# EAGLE board BlinkyTile_panel (EAGLE 7.1.0), part 1 of 2
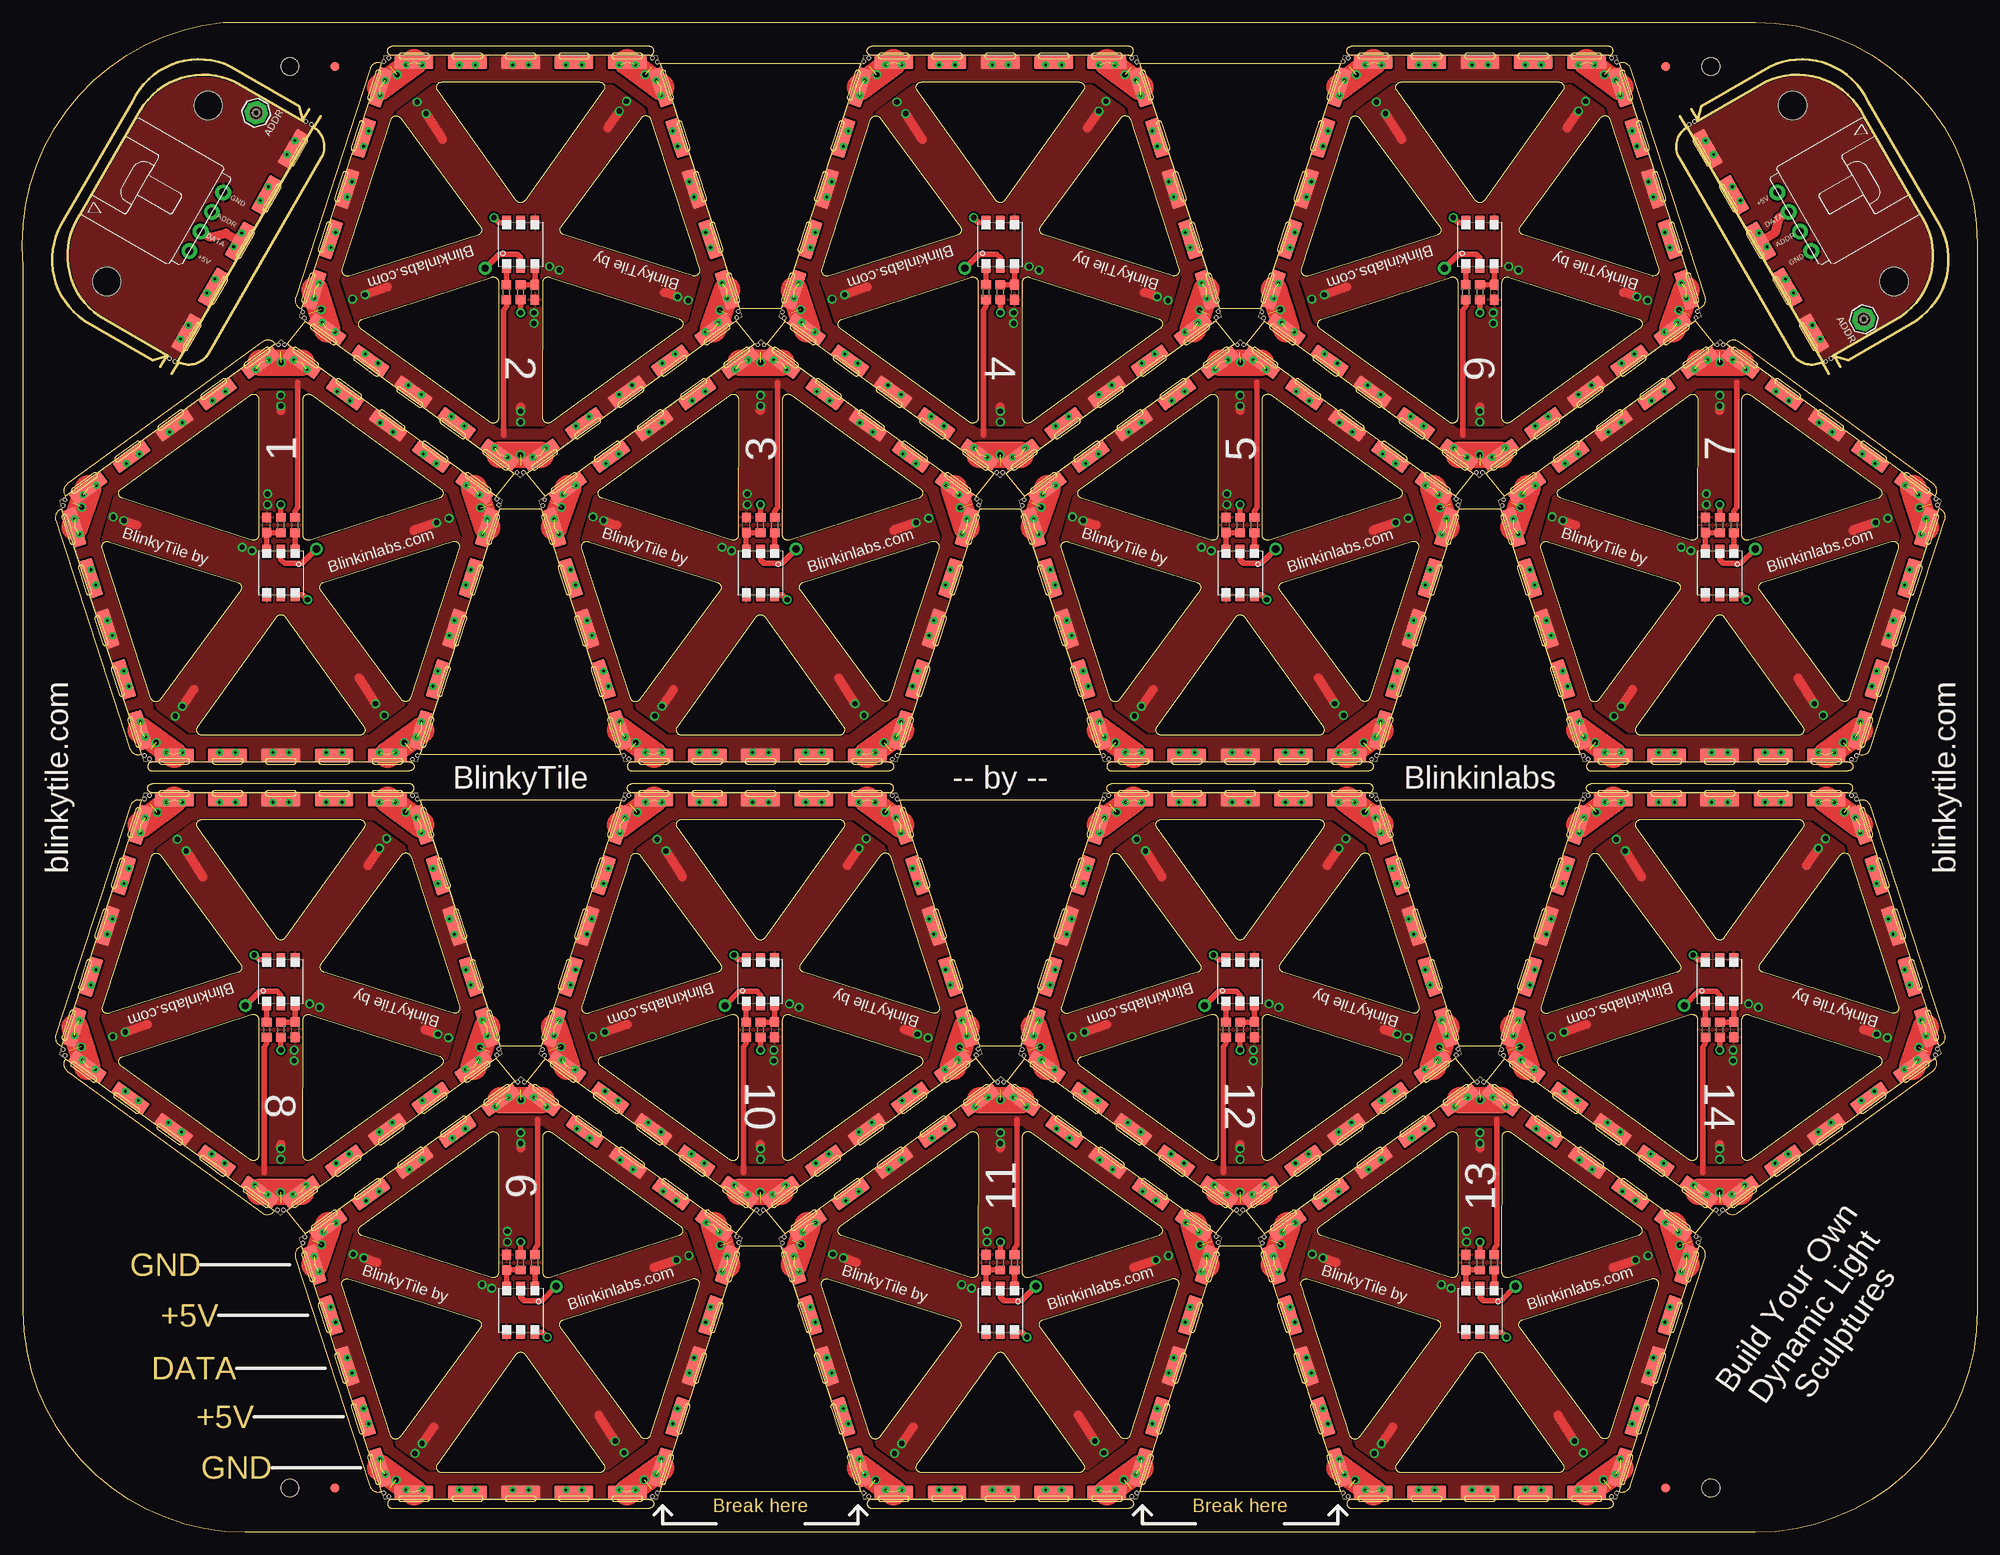
[diagram p0: board, top side]
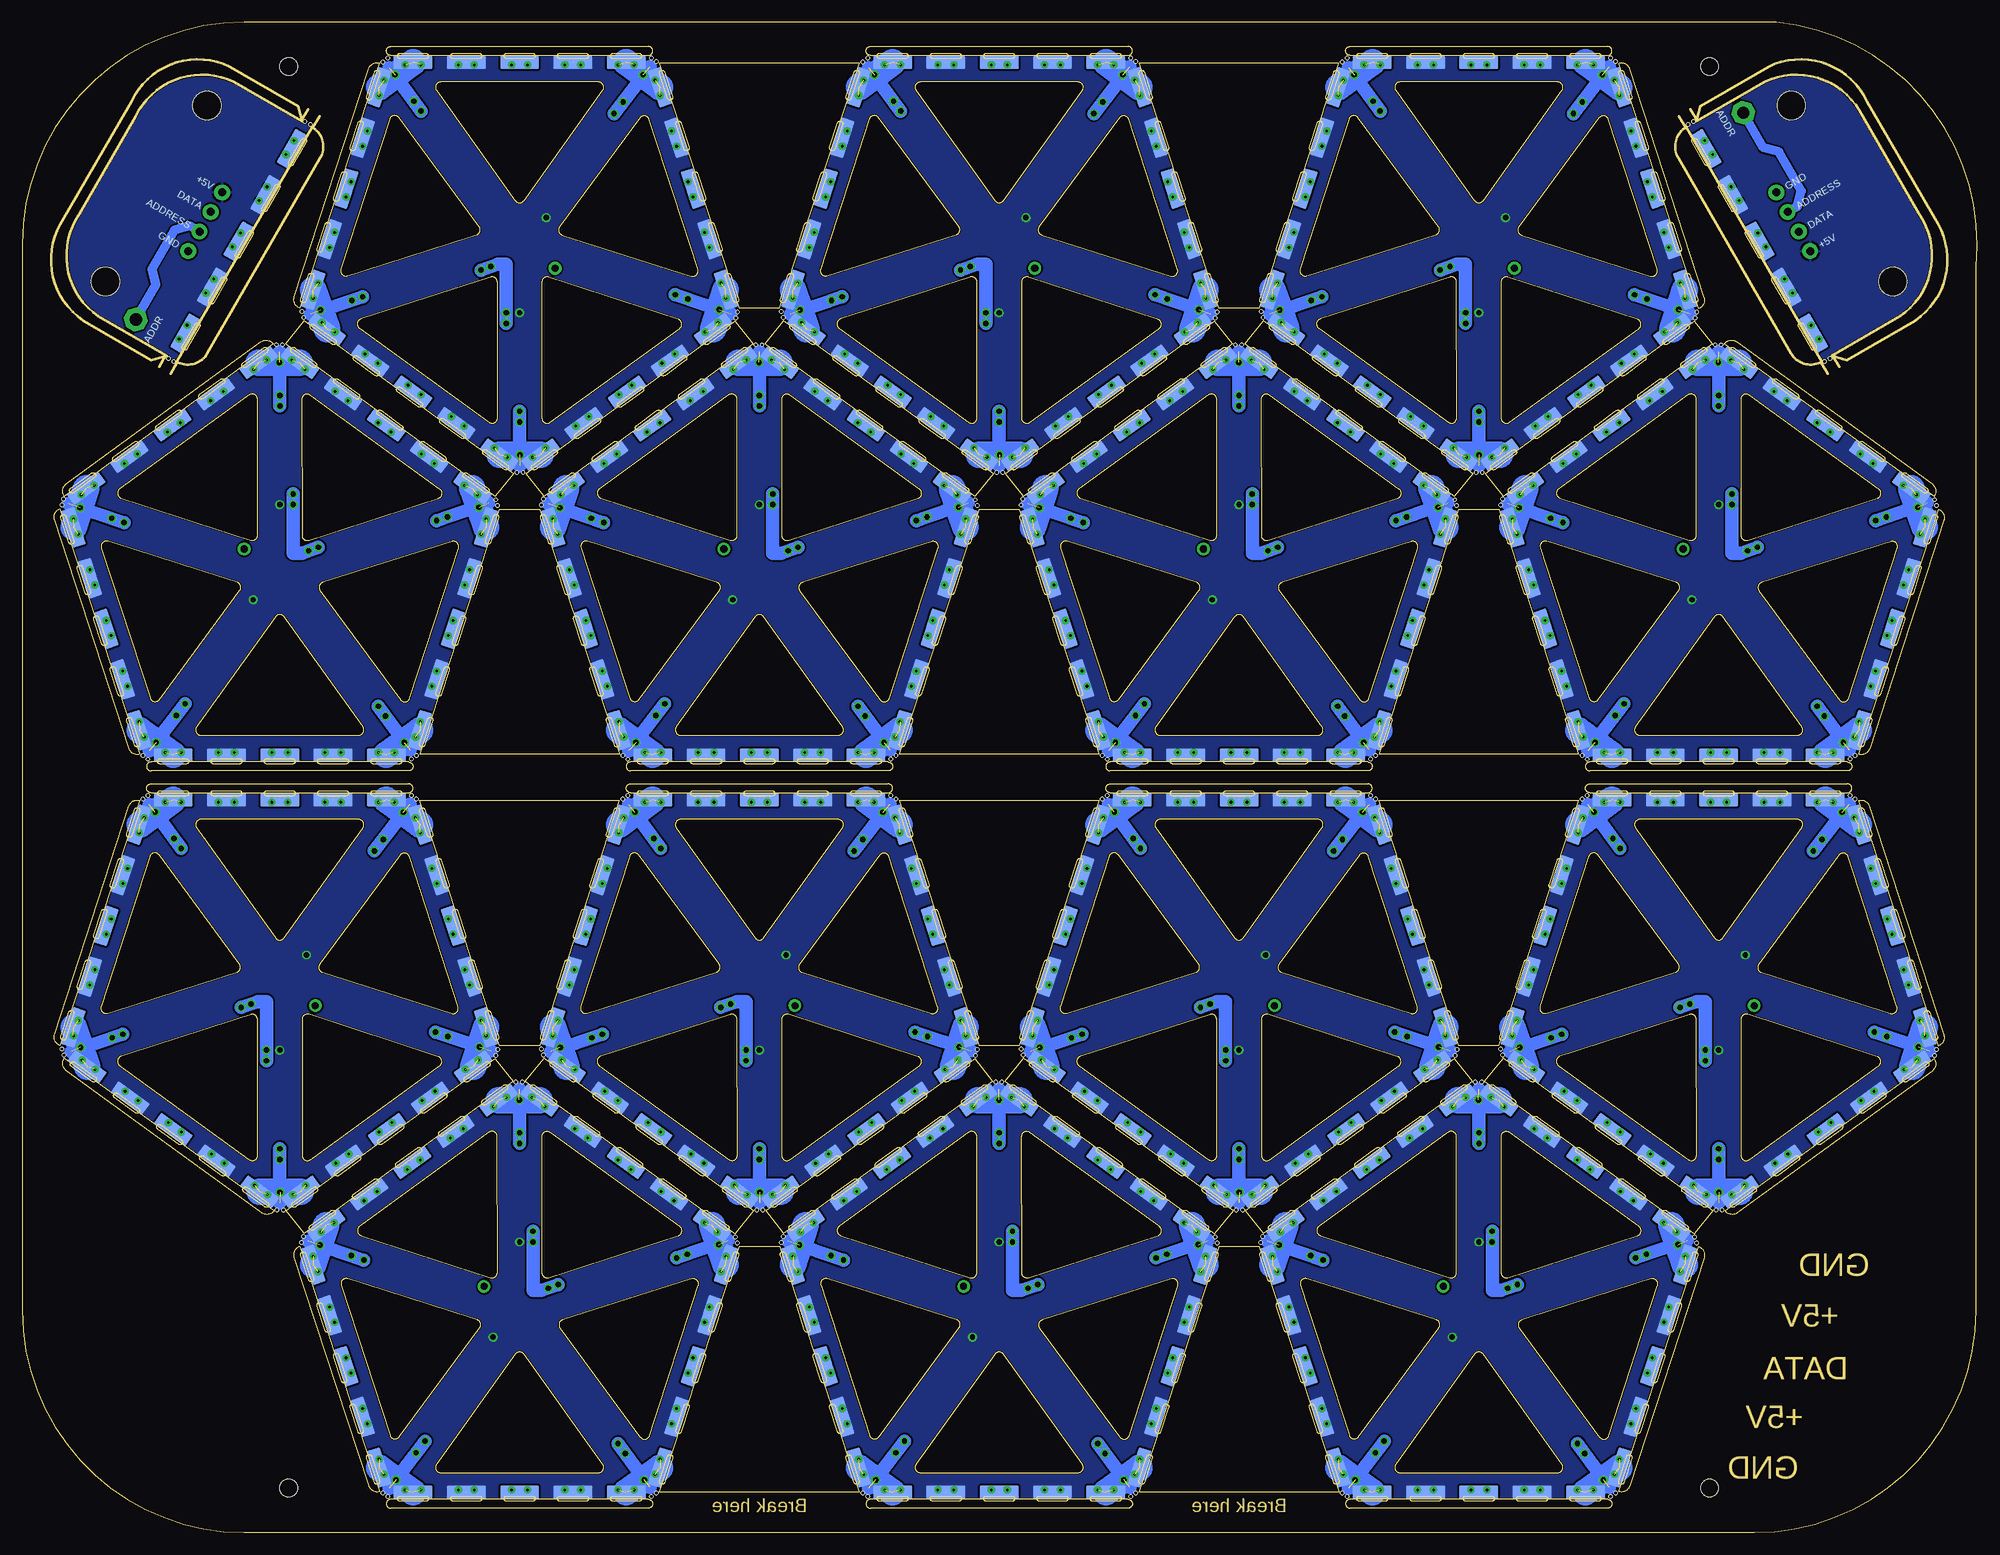
[diagram p1: board, bottom side, seen from below]

Size 220.12 x 170 mm. Coordinates in mm from the lower left corner, seen from the top.
Outline: 666 segments
Copper layers (1*16): Top 0.035mm / dielectric 1.5mm / Bottom 0.035mm
Design rules "default *": minimum track width 10mil, minimum drill 0.6mm, track to track 8mil, track to pad 8mil, pad to pad 8mil, via to via 8mil, smd to smd 8mil, copper to edge 0.1mm, drill to drill 8mil, minimum pad ring 10mil, minimum via ring 8mil, stop-mask expansion 4mil, vias tented up to drill 0.6mm, thermal gap 10mil
Holes 3.2 mm at 9.51,140.82 20.94,160.61 199.31,160.61 210.74,140.82
Holes 2 mm at 30.12,5 30.12,165 190.12,165 190.12,5

## Footprints (pad centres in the part's own frame; a part is rotated, then mirrored left to right if it is on the bottom)
C0603 = smd 1.1 x 1: 1 -0.85,0; 2 0.85,0
MOUSE_BITE_1 = hole 0.4: -0.35,0; 0.35,0
MOUSE_BITE = hole 0.4: -0.35,0.15; 0.35,0.15
DUPONT-4P = drill 0.9 pad 1.778: P$1 -3.81,0; P$2 -1.27,0; P$3 1.27,0; P$4 3.81,0
FIDUCIAL-1X2 = smd 1 x 1: 1 0,0
SE14 = drill 1.397 pad 2.54 octagon: MP 0,0
R0603 = smd 1 x 1.1: 1 -0.85,0; 2 0.85,0
D_EDGE_SLOT_MOD = drill 0.3: GNDVIA1 -12.9,1; GNDVIA3 -11.1,1; GNDVIA4 11.1,1; GNDVIA6 12.9,1; PWRVIA1 -6.9,1; PWRVIA3 -5.1,1; PWRVIA4 5.1,1; PWRVIA6 6.9,1; SIGVIA1 -0.9,1; SIGVIA3 0.9,1 | smd 4.4 x 1.5: P$1 -12,0.73; P$2 -6,0.73; P$3 0,0.73; P$4 6,0.73; P$5 12,0.73 | smd 4.4 x 1.5 bottom: P$6 -12,0.73; P$7 -6,0.73; P$8 0,0.73; P$9 6,0.73; P$10 12,0.73
WS2822S_LED = smd 1.5 x 1: 1 -2.45,1.6; 2 -2.45,0; 3 -2.45,-1.6; 4 2.45,-1.6; 5 2.45,0; 6 2.45,1.6

## Placement (x,y rotation side)
C1  .1uF  [C0603]  27.52,113.4 90 top
C2  .1uF  [C0603]  81.52,113.4 90 top
C3  .1uF  [C0603]  57.72,139.6 270 top
C5  .1uF  [C0603]  111.72,139.6 270 top
C6  .1uF  [C0603]  135.52,113.4 90 top
C7  .1uF  [C0603]  165.72,139.6 270 top
C8  .1uF  [C0603]  189.52,113.4 90 top
C9  .1uF  [C0603]  192.72,56.6 270 top
C10  .1uF  [C0603]  138.72,56.6 270 top
C11  .1uF  [C0603]  162.52,30.4 90 top
C12  .1uF  [C0603]  108.52,30.4 90 top
C13  .1uF  [C0603]  84.72,56.6 270 top
C14  .1uF  [C0603]  54.52,30.4 90 top
C15  .1uF  [C0603]  30.72,56.6 270 top
E$1  [MOUSE_BITE_1]  29.17,133.69 0 top
E$2  [MOUSE_BITE_1]  14.02,87.25 144 top
E$3  [MOUSE_BITE_1]  44.22,87.24 216 top
E$4  [MOUSE_BITE_1]  53.56,115.97 288 top
E$5  [MOUSE_BITE_1]  4.71,115.92 72 top
E$6  [MOUSE_BITE_1]  83.17,133.69 0 top
E$7  [MOUSE_BITE_1]  68.02,87.25 144 top
E$8  [MOUSE_BITE_1]  98.22,87.24 216 top
E$9  [MOUSE_BITE_1]  107.56,115.97 288 top
E$10  [MOUSE_BITE_1]  58.71,115.92 72 top
E$11  [MOUSE_BITE_1]  56.07,119.31 180 top
E$12  [MOUSE_BITE_1]  71.22,165.75 324 top
E$13  [MOUSE_BITE_1]  41.02,165.76 36 top
E$14  [MOUSE_BITE_1]  31.69,137.03 108 top
E$15  [MOUSE_BITE_1]  80.54,137.08 252 top
E$16  [MOUSE_BITE]  16.95,132.12 150 top
E$17  [MOUSE_BITE]  32.19,158.52 330 top
E$18  [DUPONT-4P]  20.72,147.54 60 top
E$19  [MOUSE_BITE]  188.05,158.52 30 top
E$20  [MOUSE_BITE]  203.29,132.12 210 top
E$21  [MOUSE_BITE_1]  110.07,119.31 180 top
E$22  [MOUSE_BITE_1]  125.22,165.75 324 top
E$23  [MOUSE_BITE_1]  95.02,165.76 36 top
E$24  [MOUSE_BITE_1]  85.69,137.03 108 top
E$25  [MOUSE_BITE_1]  134.54,137.08 252 top
E$26  [MOUSE_BITE_1]  137.17,133.69 0 top
E$27  [MOUSE_BITE_1]  122.02,87.25 144 top
E$28  [MOUSE_BITE_1]  152.22,87.24 216 top
E$29  [MOUSE_BITE_1]  161.56,115.97 288 top
E$30  [MOUSE_BITE_1]  112.71,115.92 72 top
E$31  [MOUSE_BITE_1]  164.07,119.31 180 top
E$32  [MOUSE_BITE_1]  179.22,165.75 324 top
E$33  [MOUSE_BITE_1]  149.02,165.76 36 top
E$34  [MOUSE_BITE_1]  139.69,137.03 108 top
E$35  [MOUSE_BITE_1]  188.54,137.08 252 top
E$36  [MOUSE_BITE_1]  191.17,133.69 0 top
E$37  [MOUSE_BITE_1]  176.02,87.25 144 top
E$38  [MOUSE_BITE_1]  206.22,87.24 216 top
E$39  [MOUSE_BITE_1]  215.56,115.97 288 top
E$40  [MOUSE_BITE_1]  166.71,115.92 72 top
E$41  [MOUSE_BITE_1]  191.07,36.31 180 top
E$42  [MOUSE_BITE_1]  206.22,82.75 324 top
E$43  [MOUSE_BITE_1]  176.02,82.76 36 top
E$44  [MOUSE_BITE_1]  166.69,54.03 108 top
E$45  [MOUSE_BITE_1]  215.54,54.08 252 top
E$46  [MOUSE_BITE_1]  137.07,36.31 180 top
E$47  [MOUSE_BITE_1]  152.22,82.75 324 top
E$48  [MOUSE_BITE_1]  122.02,82.76 36 top
E$49  [MOUSE_BITE_1]  112.69,54.03 108 top
E$50  [MOUSE_BITE_1]  161.54,54.08 252 top
E$51  [MOUSE_BITE_1]  164.17,50.69 0 top
E$52  [MOUSE_BITE_1]  149.02,4.25 144 top
E$53  [MOUSE_BITE_1]  179.22,4.24 216 top
E$54  [MOUSE_BITE_1]  188.56,32.97 288 top
E$55  [MOUSE_BITE_1]  139.71,32.92 72 top
E$56  [MOUSE_BITE_1]  110.17,50.69 0 top
E$57  [MOUSE_BITE_1]  95.02,4.25 144 top
E$58  [MOUSE_BITE_1]  125.22,4.24 216 top
E$59  [MOUSE_BITE_1]  134.56,32.97 288 top
E$60  [MOUSE_BITE_1]  85.71,32.92 72 top
E$61  [MOUSE_BITE_1]  83.07,36.31 180 top
E$62  [MOUSE_BITE_1]  98.22,82.75 324 top
E$63  [MOUSE_BITE_1]  68.02,82.76 36 top
E$64  [MOUSE_BITE_1]  58.69,54.03 108 top
E$65  [MOUSE_BITE_1]  107.54,54.08 252 top
E$66  [MOUSE_BITE_1]  56.17,50.69 0 top
E$67  [MOUSE_BITE_1]  41.02,4.25 144 top
E$68  [MOUSE_BITE_1]  71.22,4.24 216 top
E$69  [MOUSE_BITE_1]  80.56,32.97 288 top
E$70  [MOUSE_BITE_1]  31.71,32.92 72 top
E$71  [MOUSE_BITE_1]  29.07,36.31 180 top
E$72  [MOUSE_BITE_1]  44.22,82.75 324 top
E$73  [MOUSE_BITE_1]  14.02,82.76 36 top
E$74  [MOUSE_BITE_1]  4.69,54.03 108 top
E$75  [MOUSE_BITE_1]  53.54,54.08 252 top
E$76  [DUPONT-4P]  199.52,147.54 300 top
E$77  [FIDUCIAL-1X2]  35.2,165 0 top
E$78  [FIDUCIAL-1X2]  185.04,5 0 top
E$79  [FIDUCIAL-1X2]  185.04,165 0 top
E$80  [FIDUCIAL-1X2]  35.2,5 0 top
PROG  [SE14]  26.34,159.81 60 top
PROG1  [SE14]  207.34,136.54 300 top
R1  75  [R0603]  29.12,113.4 270 top
R2  10k  [R0603]  30.72,113.4 90 top
R3  75  [R0603]  83.12,113.4 270 top
R4  10k  [R0603]  84.72,113.4 90 top
R5  75  [R0603]  56.12,139.6 90 top
R6  10k  [R0603]  54.52,139.6 270 top
R9  75  [R0603]  110.12,139.6 90 top
R10  10k  [R0603]  108.52,139.6 270 top
R11  75  [R0603]  137.12,113.4 270 top
R12  10k  [R0603]  138.72,113.4 90 top
R13  75  [R0603]  164.12,139.6 90 top
R14  10k  [R0603]  162.52,139.6 270 top
R15  75  [R0603]  191.12,113.4 270 top
R16  10k  [R0603]  192.72,113.4 90 top
R17  75  [R0603]  191.12,56.6 90 top
R18  10k  [R0603]  189.52,56.6 270 top
R19  75  [R0603]  137.12,56.6 90 top
R20  10k  [R0603]  135.52,56.6 270 top
R21  75  [R0603]  164.12,30.4 270 top
R22  10k  [R0603]  165.72,30.4 90 top
R23  75  [R0603]  110.12,30.4 270 top
R24  10k  [R0603]  111.72,30.4 90 top
R25  75  [R0603]  83.12,56.6 90 top
R26  10k  [R0603]  81.52,56.6 270 top
R27  75  [R0603]  56.12,30.4 270 top
R28  10k  [R0603]  57.72,30.4 90 top
R29  75  [R0603]  29.12,56.6 90 top
R30  10k  [R0603]  27.52,56.6 270 top
U$1  D_EDGEMOD  [D_EDGE_SLOT_MOD]  83.12,86.8 0 top
U$2  D_EDGEMOD  [D_EDGE_SLOT_MOD]  29.12,86.8 0 top
U$3  D_EDGEMOD  [D_EDGE_SLOT_MOD]  49.32,101.5 72 top
U$4  D_EDGEMOD  [D_EDGE_SLOT_MOD]  8.92,101.5 288 top
U$5  D_EDGEMOD  [D_EDGE_SLOT_MOD]  41.62,125.2 144 top
U$6  D_EDGEMOD  [D_EDGE_SLOT_MOD]  16.72,125.2 216 top
U$7  WS2822S_LED  [WS2822S_LED]  29.12,108 270 top
U$8  D_EDGEMOD  [D_EDGE_SLOT_MOD]  103.32,101.5 72 top
U$9  D_EDGEMOD  [D_EDGE_SLOT_MOD]  62.92,101.5 288 top
U$10  D_EDGEMOD  [D_EDGE_SLOT_MOD]  95.62,125.2 144 top
U$11  D_EDGEMOD  [D_EDGE_SLOT_MOD]  70.72,125.2 216 top
U$12  WS2822S_LED  [WS2822S_LED]  83.12,108 270 top
U$13  D_EDGEMOD  [D_EDGE_SLOT_MOD]  56.12,166.2 180 top
U$14  D_EDGEMOD  [D_EDGE_SLOT_MOD]  35.92,151.5 252 top
U$15  D_EDGEMOD  [D_EDGE_SLOT_MOD]  76.32,151.5 108 top
U$16  D_EDGEMOD  [D_EDGE_SLOT_MOD]  43.62,127.8 324 top
U$17  D_EDGEMOD  [D_EDGE_SLOT_MOD]  68.52,127.8 36 top
U$18  WS2822S_LED  [WS2822S_LED]  56.12,145 90 top
U$19  D_EDGEMOD  [D_EDGE_SLOT_MOD]  195.12,145 300 top
U$25  D_EDGEMOD  [D_EDGE_SLOT_MOD]  110.12,166.2 180 top
U$26  D_EDGEMOD  [D_EDGE_SLOT_MOD]  89.92,151.5 252 top
U$27  D_EDGEMOD  [D_EDGE_SLOT_MOD]  130.32,151.5 108 top
U$28  D_EDGEMOD  [D_EDGE_SLOT_MOD]  97.62,127.8 324 top
U$29  D_EDGEMOD  [D_EDGE_SLOT_MOD]  122.52,127.8 36 top
U$30  WS2822S_LED  [WS2822S_LED]  110.12,145 90 top
U$31  D_EDGEMOD  [D_EDGE_SLOT_MOD]  137.12,86.8 0 top
U$32  D_EDGEMOD  [D_EDGE_SLOT_MOD]  157.32,101.5 72 top
U$33  D_EDGEMOD  [D_EDGE_SLOT_MOD]  116.92,101.5 288 top
U$34  D_EDGEMOD  [D_EDGE_SLOT_MOD]  149.62,125.2 144 top
U$35  D_EDGEMOD  [D_EDGE_SLOT_MOD]  124.72,125.2 216 top
U$36  WS2822S_LED  [WS2822S_LED]  137.12,108 270 top
U$37  D_EDGEMOD  [D_EDGE_SLOT_MOD]  164.12,166.2 180 top
U$38  D_EDGEMOD  [D_EDGE_SLOT_MOD]  143.92,151.5 252 top
U$39  D_EDGEMOD  [D_EDGE_SLOT_MOD]  184.32,151.5 108 top
U$40  D_EDGEMOD  [D_EDGE_SLOT_MOD]  151.62,127.8 324 top
U$41  D_EDGEMOD  [D_EDGE_SLOT_MOD]  176.52,127.8 36 top
U$42  WS2822S_LED  [WS2822S_LED]  164.12,145 90 top
U$43  D_EDGEMOD  [D_EDGE_SLOT_MOD]  191.12,86.8 0 top
U$44  D_EDGEMOD  [D_EDGE_SLOT_MOD]  211.32,101.5 72 top
U$45  D_EDGEMOD  [D_EDGE_SLOT_MOD]  170.92,101.5 288 top
U$46  D_EDGEMOD  [D_EDGE_SLOT_MOD]  203.62,125.2 144 top
U$47  D_EDGEMOD  [D_EDGE_SLOT_MOD]  178.72,125.2 216 top
U$48  WS2822S_LED  [WS2822S_LED]  191.12,108 270 top
U$49  D_EDGEMOD  [D_EDGE_SLOT_MOD]  191.12,83.2 180 top
U$50  D_EDGEMOD  [D_EDGE_SLOT_MOD]  170.92,68.5 252 top
U$51  D_EDGEMOD  [D_EDGE_SLOT_MOD]  211.32,68.5 108 top
U$52  D_EDGEMOD  [D_EDGE_SLOT_MOD]  178.62,44.8 324 top
U$53  D_EDGEMOD  [D_EDGE_SLOT_MOD]  203.52,44.8 36 top
U$54  WS2822S_LED  [WS2822S_LED]  191.12,62 90 top
U$55  D_EDGEMOD  [D_EDGE_SLOT_MOD]  137.12,83.2 180 top
U$56  D_EDGEMOD  [D_EDGE_SLOT_MOD]  116.92,68.5 252 top
U$57  D_EDGEMOD  [D_EDGE_SLOT_MOD]  157.32,68.5 108 top
U$58  D_EDGEMOD  [D_EDGE_SLOT_MOD]  124.62,44.8 324 top
U$59  D_EDGEMOD  [D_EDGE_SLOT_MOD]  149.52,44.8 36 top
U$60  WS2822S_LED  [WS2822S_LED]  137.12,62 90 top
U$61  D_EDGEMOD  [D_EDGE_SLOT_MOD]  164.12,3.8 0 top
U$62  D_EDGEMOD  [D_EDGE_SLOT_MOD]  184.32,18.5 72 top
U$63  D_EDGEMOD  [D_EDGE_SLOT_MOD]  143.92,18.5 288 top
U$64  D_EDGEMOD  [D_EDGE_SLOT_MOD]  176.62,42.2 144 top
U$65  D_EDGEMOD  [D_EDGE_SLOT_MOD]  151.72,42.2 216 top
U$66  WS2822S_LED  [WS2822S_LED]  164.12,25 270 top
U$67  D_EDGEMOD  [D_EDGE_SLOT_MOD]  110.12,3.8 0 top
U$68  D_EDGEMOD  [D_EDGE_SLOT_MOD]  130.32,18.5 72 top
U$69  D_EDGEMOD  [D_EDGE_SLOT_MOD]  89.92,18.5 288 top
U$70  D_EDGEMOD  [D_EDGE_SLOT_MOD]  122.62,42.2 144 top
U$71  D_EDGEMOD  [D_EDGE_SLOT_MOD]  97.72,42.2 216 top
U$72  WS2822S_LED  [WS2822S_LED]  110.12,25 270 top
U$73  D_EDGEMOD  [D_EDGE_SLOT_MOD]  83.12,83.2 180 top
U$74  D_EDGEMOD  [D_EDGE_SLOT_MOD]  62.92,68.5 252 top
U$75  D_EDGEMOD  [D_EDGE_SLOT_MOD]  103.32,68.5 108 top
U$76  D_EDGEMOD  [D_EDGE_SLOT_MOD]  70.62,44.8 324 top
U$77  D_EDGEMOD  [D_EDGE_SLOT_MOD]  95.52,44.8 36 top
U$78  WS2822S_LED  [WS2822S_LED]  83.12,62 90 top
U$79  D_EDGEMOD  [D_EDGE_SLOT_MOD]  56.12,3.8 0 top
U$80  D_EDGEMOD  [D_EDGE_SLOT_MOD]  76.32,18.5 72 top
U$81  D_EDGEMOD  [D_EDGE_SLOT_MOD]  35.92,18.5 288 top
U$82  D_EDGEMOD  [D_EDGE_SLOT_MOD]  68.62,42.2 144 top
U$83  D_EDGEMOD  [D_EDGE_SLOT_MOD]  43.72,42.2 216 top
U$84  WS2822S_LED  [WS2822S_LED]  56.12,25 270 top
U$85  D_EDGEMOD  [D_EDGE_SLOT_MOD]  29.12,83.2 180 top
U$86  D_EDGEMOD  [D_EDGE_SLOT_MOD]  8.92,68.5 252 top
U$87  D_EDGEMOD  [D_EDGE_SLOT_MOD]  49.32,68.5 108 top
U$88  D_EDGEMOD  [D_EDGE_SLOT_MOD]  16.62,44.8 324 top
U$89  D_EDGEMOD  [D_EDGE_SLOT_MOD]  41.52,44.8 36 top
U$90  WS2822S_LED  [WS2822S_LED]  29.12,62 90 top
U$91  D_EDGEMOD  [D_EDGE_SLOT_MOD]  25.12,145 60 top

## Library data of the parts
C1-C3 C5-C15 R1-R6 R9-R30 = adafruit
E$1-E$17 E$19-E$75 U$1-U$6 U$8-U$11 U$13-U$17 U$19 U$25-U$29 U$31-U$35 U$37-U$41 U$43-U$47 U$49-U$53 U$55-U$59 U$61-U$65 U$67-U$71 U$73-U$77 U$79-U$83 U$85-U$89 U$91 = dodocohedreled
E$18 E$76 = Sam-Lib
E$77-E$80 = SparkFun-Aesthetics
PROG PROG1 = solpad
U$7 U$12 U$18 U$30 U$36 U$42 U$48 U$54 U$60 U$66 U$72 U$78 U$84 U$90 = blinkinlabs

## Nets
5V: R1.1 U$2.P$2 U$2.P$4 U$2.P$7 U$2.P$9 U$2.PWRVIA1 U$2.PWRVIA3 U$2.PWRVIA4 U$2.PWRVIA6 U$3.P$2 U$3.P$4 U$3.P$7 U$3.P$9 U$3.PWRVIA1 U$3.PWRVIA3 U$3.PWRVIA4 U$3.PWRVIA6 U$4.P$2 U$4.P$4 U$4.P$7 U$4.P$9 U$4.PWRVIA1 U$4.PWRVIA3 U$4.PWRVIA4 U$4.PWRVIA6 U$5.P$2 U$5.P$4 U$5.P$7 U$5.P$9 U$5.PWRVIA1 U$5.PWRVIA3 U$5.PWRVIA4 U$5.PWRVIA6 U$6.P$2 U$6.P$4 U$6.P$7 U$6.P$9 U$6.PWRVIA1 U$6.PWRVIA3 U$6.PWRVIA4 U$6.PWRVIA6 U$7.6
5V1: R3.1 U$1.P$2 U$1.P$4 U$1.P$7 U$1.P$9 U$1.PWRVIA1 U$1.PWRVIA3 U$1.PWRVIA4 U$1.PWRVIA6 U$8.P$2 U$8.P$4 U$8.P$7 U$8.P$9 U$8.PWRVIA1 U$8.PWRVIA3 U$8.PWRVIA4 U$8.PWRVIA6 U$9.P$2 U$9.P$4 U$9.P$7 U$9.P$9 U$9.PWRVIA1 U$9.PWRVIA3 U$9.PWRVIA4 U$9.PWRVIA6 U$10.P$2 U$10.P$4 U$10.P$7 U$10.P$9 U$10.PWRVIA1 U$10.PWRVIA3 U$10.PWRVIA4 U$10.PWRVIA6 U$11.P$2 U$11.P$4 U$11.P$7 U$11.P$9 U$11.PWRVIA1 U$11.PWRVIA3 U$11.PWRVIA4 U$11.PWRVIA6 U$12.6
5V2: R5.1 U$13.P$2 U$13.P$4 U$13.P$7 U$13.P$9 U$13.PWRVIA1 U$13.PWRVIA3 U$13.PWRVIA4 U$13.PWRVIA6 U$14.P$2 U$14.P$4 U$14.P$7 U$14.P$9 U$14.PWRVIA1 U$14.PWRVIA3 U$14.PWRVIA4 U$14.PWRVIA6 U$15.P$2 U$15.P$4 U$15.P$7 U$15.P$9 U$15.PWRVIA1 U$15.PWRVIA3 U$15.PWRVIA4 U$15.PWRVIA6 U$16.P$2 U$16.P$4 U$16.P$7 U$16.P$9 U$16.PWRVIA1 U$16.PWRVIA3 U$16.PWRVIA4 U$16.PWRVIA6 U$17.P$2 U$17.P$4 U$17.P$7 U$17.P$9 U$17.PWRVIA1 U$17.PWRVIA3 U$17.PWRVIA4 U$17.PWRVIA6 U$18.6
5V4: R9.1 U$25.P$2 U$25.P$4 U$25.P$7 U$25.P$9 U$25.PWRVIA1 U$25.PWRVIA3 U$25.PWRVIA4 U$25.PWRVIA6 U$26.P$2 U$26.P$4 U$26.P$7 U$26.P$9 U$26.PWRVIA1 U$26.PWRVIA3 U$26.PWRVIA4 U$26.PWRVIA6 U$27.P$2 U$27.P$4 U$27.P$7 U$27.P$9 U$27.PWRVIA1 U$27.PWRVIA3 U$27.PWRVIA4 U$27.PWRVIA6 U$28.P$2 U$28.P$4 U$28.P$7 U$28.P$9 U$28.PWRVIA1 U$28.PWRVIA3 U$28.PWRVIA4 U$28.PWRVIA6 U$29.P$2 U$29.P$4 U$29.P$7 U$29.P$9 U$29.PWRVIA1 U$29.PWRVIA3 U$29.PWRVIA4 U$29.PWRVIA6 U$30.6
5V5: R11.1 U$31.P$2 U$31.P$4 U$31.P$7 U$31.P$9 U$31.PWRVIA1 U$31.PWRVIA3 U$31.PWRVIA4 U$31.PWRVIA6 U$32.P$2 U$32.P$4 U$32.P$7 U$32.P$9 U$32.PWRVIA1 U$32.PWRVIA3 U$32.PWRVIA4 U$32.PWRVIA6 U$33.P$2 U$33.P$4 U$33.P$7 U$33.P$9 U$33.PWRVIA1 U$33.PWRVIA3 U$33.PWRVIA4 U$33.PWRVIA6 U$34.P$2 U$34.P$4 U$34.P$7 U$34.P$9 U$34.PWRVIA1 U$34.PWRVIA3 U$34.PWRVIA4 U$34.PWRVIA6 U$35.P$2 U$35.P$4 U$35.P$7 U$35.P$9 U$35.PWRVIA1 U$35.PWRVIA3 U$35.PWRVIA4 U$35.PWRVIA6 U$36.6
5V6: R13.1 U$37.P$2 U$37.P$4 U$37.P$7 U$37.P$9 U$37.PWRVIA1 U$37.PWRVIA3 U$37.PWRVIA4 U$37.PWRVIA6 U$38.P$2 U$38.P$4 U$38.P$7 U$38.P$9 U$38.PWRVIA1 U$38.PWRVIA3 U$38.PWRVIA4 U$38.PWRVIA6 U$39.P$2 U$39.P$4 U$39.P$7 U$39.P$9 U$39.PWRVIA1 U$39.PWRVIA3 U$39.PWRVIA4 U$39.PWRVIA6 U$40.P$2 U$40.P$4 U$40.P$7 U$40.P$9 U$40.PWRVIA1 U$40.PWRVIA3 U$40.PWRVIA4 U$40.PWRVIA6 U$41.P$2 U$41.P$4 U$41.P$7 U$41.P$9 U$41.PWRVIA1 U$41.PWRVIA3 U$41.PWRVIA4 U$41.PWRVIA6 U$42.6
5V7: R15.1 U$43.P$2 U$43.P$4 U$43.P$7 U$43.P$9 U$43.PWRVIA1 U$43.PWRVIA3 U$43.PWRVIA4 U$43.PWRVIA6 U$44.P$2 U$44.P$4 U$44.P$7 U$44.P$9 U$44.PWRVIA1 U$44.PWRVIA3 U$44.PWRVIA4 U$44.PWRVIA6 U$45.P$2 U$45.P$4 U$45.P$7 U$45.P$9 U$45.PWRVIA1 U$45.PWRVIA3 U$45.PWRVIA4 U$45.PWRVIA6 U$46.P$2 U$46.P$4 U$46.P$7 U$46.P$9 U$46.PWRVIA1 U$46.PWRVIA3 U$46.PWRVIA4 U$46.PWRVIA6 U$47.P$2 U$47.P$4 U$47.P$7 U$47.P$9 U$47.PWRVIA1 U$47.PWRVIA3 U$47.PWRVIA4 U$47.PWRVIA6 U$48.6
5V8: R17.1 U$49.P$2 U$49.P$4 U$49.P$7 U$49.P$9 U$49.PWRVIA1 U$49.PWRVIA3 U$49.PWRVIA4 U$49.PWRVIA6 U$50.P$2 U$50.P$4 U$50.P$7 U$50.P$9 U$50.PWRVIA1 U$50.PWRVIA3 U$50.PWRVIA4 U$50.PWRVIA6 U$51.P$2 U$51.P$4 U$51.P$7 U$51.P$9 U$51.PWRVIA1 U$51.PWRVIA3 U$51.PWRVIA4 U$51.PWRVIA6 U$52.P$2 U$52.P$4 U$52.P$7 U$52.P$9 U$52.PWRVIA1 U$52.PWRVIA3 U$52.PWRVIA4 U$52.PWRVIA6 U$53.P$2 U$53.P$4 U$53.P$7 U$53.P$9 U$53.PWRVIA1 U$53.PWRVIA3 U$53.PWRVIA4 U$53.PWRVIA6 U$54.6
5V9: R19.1 U$55.P$2 U$55.P$4 U$55.P$7 U$55.P$9 U$55.PWRVIA1 U$55.PWRVIA3 U$55.PWRVIA4 U$55.PWRVIA6 U$56.P$2 U$56.P$4 U$56.P$7 U$56.P$9 U$56.PWRVIA1 U$56.PWRVIA3 U$56.PWRVIA4 U$56.PWRVIA6 U$57.P$2 U$57.P$4 U$57.P$7 U$57.P$9 U$57.PWRVIA1 U$57.PWRVIA3 U$57.PWRVIA4 U$57.PWRVIA6 U$58.P$2 U$58.P$4 U$58.P$7 U$58.P$9 U$58.PWRVIA1 U$58.PWRVIA3 U$58.PWRVIA4 U$58.PWRVIA6 U$59.P$2 U$59.P$4 U$59.P$7 U$59.P$9 U$59.PWRVIA1 U$59.PWRVIA3 U$59.PWRVIA4 U$59.PWRVIA6 U$60.6
5V10: R21.1 U$61.P$2 U$61.P$4 U$61.P$7 U$61.P$9 U$61.PWRVIA1 U$61.PWRVIA3 U$61.PWRVIA4 U$61.PWRVIA6 U$62.P$2 U$62.P$4 U$62.P$7 U$62.P$9 U$62.PWRVIA1 U$62.PWRVIA3 U$62.PWRVIA4 U$62.PWRVIA6 U$63.P$2 U$63.P$4 U$63.P$7 U$63.P$9 U$63.PWRVIA1 U$63.PWRVIA3 U$63.PWRVIA4 U$63.PWRVIA6 U$64.P$2 U$64.P$4 U$64.P$7 U$64.P$9 U$64.PWRVIA1 U$64.PWRVIA3 U$64.PWRVIA4 U$64.PWRVIA6 U$65.P$2 U$65.P$4 U$65.P$7 U$65.P$9 U$65.PWRVIA1 U$65.PWRVIA3 U$65.PWRVIA4 U$65.PWRVIA6 U$66.6
5V11: R23.1 U$67.P$2 U$67.P$4 U$67.P$7 U$67.P$9 U$67.PWRVIA1 U$67.PWRVIA3 U$67.PWRVIA4 U$67.PWRVIA6 U$68.P$2 U$68.P$4 U$68.P$7 U$68.P$9 U$68.PWRVIA1 U$68.PWRVIA3 U$68.PWRVIA4 U$68.PWRVIA6 U$69.P$2 U$69.P$4 U$69.P$7 U$69.P$9 U$69.PWRVIA1 U$69.PWRVIA3 U$69.PWRVIA4 U$69.PWRVIA6 U$70.P$2 U$70.P$4 U$70.P$7 U$70.P$9 U$70.PWRVIA1 U$70.PWRVIA3 U$70.PWRVIA4 U$70.PWRVIA6 U$71.P$2 U$71.P$4 U$71.P$7 U$71.P$9 U$71.PWRVIA1 U$71.PWRVIA3 U$71.PWRVIA4 U$71.PWRVIA6 U$72.6
5V12: R25.1 U$73.P$2 U$73.P$4 U$73.P$7 U$73.P$9 U$73.PWRVIA1 U$73.PWRVIA3 U$73.PWRVIA4 U$73.PWRVIA6 U$74.P$2 U$74.P$4 U$74.P$7 U$74.P$9 U$74.PWRVIA1 U$74.PWRVIA3 U$74.PWRVIA4 U$74.PWRVIA6 U$75.P$2 U$75.P$4 U$75.P$7 U$75.P$9 U$75.PWRVIA1 U$75.PWRVIA3 U$75.PWRVIA4 U$75.PWRVIA6 U$76.P$2 U$76.P$4 U$76.P$7 U$76.P$9 U$76.PWRVIA1 U$76.PWRVIA3 U$76.PWRVIA4 U$76.PWRVIA6 U$77.P$2 U$77.P$4 U$77.P$7 U$77.P$9 U$77.PWRVIA1 U$77.PWRVIA3 U$77.PWRVIA4 U$77.PWRVIA6 U$78.6
5V13: R27.1 U$79.P$2 U$79.P$4 U$79.P$7 U$79.P$9 U$79.PWRVIA1 U$79.PWRVIA3 U$79.PWRVIA4 U$79.PWRVIA6 U$80.P$2 U$80.P$4 U$80.P$7 U$80.P$9 U$80.PWRVIA1 U$80.PWRVIA3 U$80.PWRVIA4 U$80.PWRVIA6 U$81.P$2 U$81.P$4 U$81.P$7 U$81.P$9 U$81.PWRVIA1 U$81.PWRVIA3 U$81.PWRVIA4 U$81.PWRVIA6 U$82.P$2 U$82.P$4 U$82.P$7 U$82.P$9 U$82.PWRVIA1 U$82.PWRVIA3 U$82.PWRVIA4 U$82.PWRVIA6 U$83.P$2 U$83.P$4 U$83.P$7 U$83.P$9 U$83.PWRVIA1 U$83.PWRVIA3 U$83.PWRVIA4 U$83.PWRVIA6 U$84.6
5V14: R29.1 U$85.P$2 U$85.P$4 U$85.P$7 U$85.P$9 U$85.PWRVIA1 U$85.PWRVIA3 U$85.PWRVIA4 U$85.PWRVIA6 U$86.P$2 U$86.P$4 U$86.P$7 U$86.P$9 U$86.PWRVIA1 U$86.PWRVIA3 U$86.PWRVIA4 U$86.PWRVIA6 U$87.P$2 U$87.P$4 U$87.P$7 U$87.P$9 U$87.PWRVIA1 U$87.PWRVIA3 U$87.PWRVIA4 U$87.PWRVIA6 U$88.P$2 U$88.P$4 U$88.P$7 U$88.P$9 U$88.PWRVIA1 U$88.PWRVIA3 U$88.PWRVIA4 U$88.PWRVIA6 U$89.P$2 U$89.P$4 U$89.P$7 U$89.P$9 U$89.PWRVIA1 U$89.PWRVIA3 U$89.PWRVIA4 U$89.PWRVIA6 U$90.6
ADRI: U$7.2
ADRI1: U$12.2
ADRI2: U$18.2
ADRI4: U$30.2
ADRI5: U$36.2
ADRI6: U$42.2
ADRI7: U$48.2
ADRI8: U$54.2
ADRI9: U$60.2
ADRI10: U$66.2
ADRI11: U$72.2
ADRI12: U$78.2
ADRI13: U$84.2
ADRI14: U$90.2
DATA: R2.2 U$2.P$3 U$2.P$8 U$2.SIGVIA1 U$2.SIGVIA3 U$3.P$3 U$3.P$8 U$3.SIGVIA1 U$3.SIGVIA3 U$4.P$3 U$4.P$8 U$4.SIGVIA1 U$4.SIGVIA3 U$5.P$3 U$5.P$8 U$5.SIGVIA1 U$5.SIGVIA3 U$6.P$3 U$6.P$8 U$6.SIGVIA1 U$6.SIGVIA3
DATA1: R4.2 U$1.P$3 U$1.P$8 U$1.SIGVIA1 U$1.SIGVIA3 U$8.P$3 U$8.P$8 U$8.SIGVIA1 U$8.SIGVIA3 U$9.P$3 U$9.P$8 U$9.SIGVIA1 U$9.SIGVIA3 U$10.P$3 U$10.P$8 U$10.SIGVIA1 U$10.SIGVIA3 U$11.P$3 U$11.P$8 U$11.SIGVIA1 U$11.SIGVIA3
DATA2: R6.2 U$13.P$3 U$13.P$8 U$13.SIGVIA1 U$13.SIGVIA3 U$14.P$3 U$14.P$8 U$14.SIGVIA1 U$14.SIGVIA3 U$15.P$3 U$15.P$8 U$15.SIGVIA1 U$15.SIGVIA3 U$16.P$3 U$16.P$8 U$16.SIGVIA1 U$16.SIGVIA3 U$17.P$3 U$17.P$8 U$17.SIGVIA1 U$17.SIGVIA3
DATA4: R10.2 U$25.P$3 U$25.P$8 U$25.SIGVIA1 U$25.SIGVIA3 U$26.P$3 U$26.P$8 U$26.SIGVIA1 U$26.SIGVIA3 U$27.P$3 U$27.P$8 U$27.SIGVIA1 U$27.SIGVIA3 U$28.P$3 U$28.P$8 U$28.SIGVIA1 U$28.SIGVIA3 U$29.P$3 U$29.P$8 U$29.SIGVIA1 U$29.SIGVIA3
DATA5: R12.2 U$31.P$3 U$31.P$8 U$31.SIGVIA1 U$31.SIGVIA3 U$32.P$3 U$32.P$8 U$32.SIGVIA1 U$32.SIGVIA3 U$33.P$3 U$33.P$8 U$33.SIGVIA1 U$33.SIGVIA3 U$34.P$3 U$34.P$8 U$34.SIGVIA1 U$34.SIGVIA3 U$35.P$3 U$35.P$8 U$35.SIGVIA1 U$35.SIGVIA3
DATA6: R14.2 U$37.P$3 U$37.P$8 U$37.SIGVIA1 U$37.SIGVIA3 U$38.P$3 U$38.P$8 U$38.SIGVIA1 U$38.SIGVIA3 U$39.P$3 U$39.P$8 U$39.SIGVIA1 U$39.SIGVIA3 U$40.P$3 U$40.P$8 U$40.SIGVIA1 U$40.SIGVIA3 U$41.P$3 U$41.P$8 U$41.SIGVIA1 U$41.SIGVIA3
DATA7: R16.2 U$43.P$3 U$43.P$8 U$43.SIGVIA1 U$43.SIGVIA3 U$44.P$3 U$44.P$8 U$44.SIGVIA1 U$44.SIGVIA3 U$45.P$3 U$45.P$8 U$45.SIGVIA1 U$45.SIGVIA3 U$46.P$3 U$46.P$8 U$46.SIGVIA1 U$46.SIGVIA3 U$47.P$3 U$47.P$8 U$47.SIGVIA1 U$47.SIGVIA3
DATA8: R18.2 U$49.P$3 U$49.P$8 U$49.SIGVIA1 U$49.SIGVIA3 U$50.P$3 U$50.P$8 U$50.SIGVIA1 U$50.SIGVIA3 U$51.P$3 U$51.P$8 U$51.SIGVIA1 U$51.SIGVIA3 U$52.P$3 U$52.P$8 U$52.SIGVIA1 U$52.SIGVIA3 U$53.P$3 U$53.P$8 U$53.SIGVIA1 U$53.SIGVIA3
DATA9: R20.2 U$55.P$3 U$55.P$8 U$55.SIGVIA1 U$55.SIGVIA3 U$56.P$3 U$56.P$8 U$56.SIGVIA1 U$56.SIGVIA3 U$57.P$3 U$57.P$8 U$57.SIGVIA1 U$57.SIGVIA3 U$58.P$3 U$58.P$8 U$58.SIGVIA1 U$58.SIGVIA3 U$59.P$3 U$59.P$8 U$59.SIGVIA1 U$59.SIGVIA3
DATA10: R22.2 U$61.P$3 U$61.P$8 U$61.SIGVIA1 U$61.SIGVIA3 U$62.P$3 U$62.P$8 U$62.SIGVIA1 U$62.SIGVIA3 U$63.P$3 U$63.P$8 U$63.SIGVIA1 U$63.SIGVIA3 U$64.P$3 U$64.P$8 U$64.SIGVIA1 U$64.SIGVIA3 U$65.P$3 U$65.P$8 U$65.SIGVIA1 U$65.SIGVIA3
DATA11: R24.2 U$67.P$3 U$67.P$8 U$67.SIGVIA1 U$67.SIGVIA3 U$68.P$3 U$68.P$8 U$68.SIGVIA1 U$68.SIGVIA3 U$69.P$3 U$69.P$8 U$69.SIGVIA1 U$69.SIGVIA3 U$70.P$3 U$70.P$8 U$70.SIGVIA1 U$70.SIGVIA3 U$71.P$3 U$71.P$8 U$71.SIGVIA1 U$71.SIGVIA3
DATA12: R26.2 U$73.P$3 U$73.P$8 U$73.SIGVIA1 U$73.SIGVIA3 U$74.P$3 U$74.P$8 U$74.SIGVIA1 U$74.SIGVIA3 U$75.P$3 U$75.P$8 U$75.SIGVIA1 U$75.SIGVIA3 U$76.P$3 U$76.P$8 U$76.SIGVIA1 U$76.SIGVIA3 U$77.P$3 U$77.P$8 U$77.SIGVIA1 U$77.SIGVIA3
DATA13: R28.2 U$79.P$3 U$79.P$8 U$79.SIGVIA1 U$79.SIGVIA3 U$80.P$3 U$80.P$8 U$80.SIGVIA1 U$80.SIGVIA3 U$81.P$3 U$81.P$8 U$81.SIGVIA1 U$81.SIGVIA3 U$82.P$3 U$82.P$8 U$82.SIGVIA1 U$82.SIGVIA3 U$83.P$3 U$83.P$8 U$83.SIGVIA1 U$83.SIGVIA3
DATA14: R30.2 U$85.P$3 U$85.P$8 U$85.SIGVIA1 U$85.SIGVIA3 U$86.P$3 U$86.P$8 U$86.SIGVIA1 U$86.SIGVIA3 U$87.P$3 U$87.P$8 U$87.SIGVIA1 U$87.SIGVIA3 U$88.P$3 U$88.P$8 U$88.SIGVIA1 U$88.SIGVIA3 U$89.P$3 U$89.P$8 U$89.SIGVIA1 U$89.SIGVIA3
GND: C1.2 U$2.GNDVIA1 U$2.GNDVIA3 U$2.GNDVIA4 U$2.GNDVIA6 U$2.P$1 U$2.P$5 U$2.P$6 U$2.P$10 U$3.GNDVIA1 U$3.GNDVIA3 U$3.GNDVIA4 U$3.GNDVIA6 U$3.P$1 U$3.P$5 U$3.P$6 U$3.P$10 U$4.GNDVIA1 U$4.GNDVIA3 U$4.GNDVIA4 U$4.GNDVIA6 U$4.P$1 U$4.P$5 U$4.P$6 U$4.P$10 U$5.GNDVIA1 U$5.GNDVIA3 U$5.GNDVIA4 U$5.GNDVIA6 U$5.P$1 U$5.P$5 U$5.P$6 U$5.P$10 U$6.GNDVIA1 U$6.GNDVIA3 U$6.GNDVIA4 U$6.GNDVIA6 U$6.P$1 U$6.P$5 U$6.P$6 U$6.P$10 U$7.4
GND1: C2.2 U$1.GNDVIA1 U$1.GNDVIA3 U$1.GNDVIA4 U$1.GNDVIA6 U$1.P$1 U$1.P$5 U$1.P$6 U$1.P$10 U$8.GNDVIA1 U$8.GNDVIA3 U$8.GNDVIA4 U$8.GNDVIA6 U$8.P$1 U$8.P$5 U$8.P$6 U$8.P$10 U$9.GNDVIA1 U$9.GNDVIA3 U$9.GNDVIA4 U$9.GNDVIA6 U$9.P$1 U$9.P$5 U$9.P$6 U$9.P$10 U$10.GNDVIA1 U$10.GNDVIA3 U$10.GNDVIA4 U$10.GNDVIA6 U$10.P$1 U$10.P$5 U$10.P$6 U$10.P$10 U$11.GNDVIA1 U$11.GNDVIA3 U$11.GNDVIA4 U$11.GNDVIA6 U$11.P$1 U$11.P$5 U$11.P$6 U$11.P$10 U$12.4
GND2: C3.2 U$13.GNDVIA1 U$13.GNDVIA3 U$13.GNDVIA4 U$13.GNDVIA6 U$13.P$1 U$13.P$5 U$13.P$6 U$13.P$10 U$14.GNDVIA1 U$14.GNDVIA3 U$14.GNDVIA4 U$14.GNDVIA6 U$14.P$1 U$14.P$5 U$14.P$6 U$14.P$10 U$15.GNDVIA1 U$15.GNDVIA3 U$15.GNDVIA4 U$15.GNDVIA6 U$15.P$1 U$15.P$5 U$15.P$6 U$15.P$10 U$16.GNDVIA1 U$16.GNDVIA3 U$16.GNDVIA4 U$16.GNDVIA6 U$16.P$1 U$16.P$5 U$16.P$6 U$16.P$10 U$17.GNDVIA1 U$17.GNDVIA3 U$17.GNDVIA4 U$17.GNDVIA6 U$17.P$1 U$17.P$5 U$17.P$6 U$17.P$10 U$18.4
GND4: C5.2 U$25.GNDVIA1 U$25.GNDVIA3 U$25.GNDVIA4 U$25.GNDVIA6 U$25.P$1 U$25.P$5 U$25.P$6 U$25.P$10 U$26.GNDVIA1 U$26.GNDVIA3 U$26.GNDVIA4 U$26.GNDVIA6 U$26.P$1 U$26.P$5 U$26.P$6 U$26.P$10 U$27.GNDVIA1 U$27.GNDVIA3 U$27.GNDVIA4 U$27.GNDVIA6 U$27.P$1 U$27.P$5 U$27.P$6 U$27.P$10 U$28.GNDVIA1 U$28.GNDVIA3 U$28.GNDVIA4 U$28.GNDVIA6 U$28.P$1 U$28.P$5 U$28.P$6 U$28.P$10 U$29.GNDVIA1 U$29.GNDVIA3 U$29.GNDVIA4 U$29.GNDVIA6 U$29.P$1 U$29.P$5 U$29.P$6 U$29.P$10 U$30.4
GND5: C6.2 U$31.GNDVIA1 U$31.GNDVIA3 U$31.GNDVIA4 U$31.GNDVIA6 U$31.P$1 U$31.P$5 U$31.P$6 U$31.P$10 U$32.GNDVIA1 U$32.GNDVIA3 U$32.GNDVIA4 U$32.GNDVIA6 U$32.P$1 U$32.P$5 U$32.P$6 U$32.P$10 U$33.GNDVIA1 U$33.GNDVIA3 U$33.GNDVIA4 U$33.GNDVIA6 U$33.P$1 U$33.P$5 U$33.P$6 U$33.P$10 U$34.GNDVIA1 U$34.GNDVIA3 U$34.GNDVIA4 U$34.GNDVIA6 U$34.P$1 U$34.P$5 U$34.P$6 U$34.P$10 U$35.GNDVIA1 U$35.GNDVIA3 U$35.GNDVIA4 U$35.GNDVIA6 U$35.P$1 U$35.P$5 U$35.P$6 U$35.P$10 U$36.4
GND6: C7.2 U$37.GNDVIA1 U$37.GNDVIA3 U$37.GNDVIA4 U$37.GNDVIA6 U$37.P$1 U$37.P$5 U$37.P$6 U$37.P$10 U$38.GNDVIA1 U$38.GNDVIA3 U$38.GNDVIA4 U$38.GNDVIA6 U$38.P$1 U$38.P$5 U$38.P$6 U$38.P$10 U$39.GNDVIA1 U$39.GNDVIA3 U$39.GNDVIA4 U$39.GNDVIA6 U$39.P$1 U$39.P$5 U$39.P$6 U$39.P$10 U$40.GNDVIA1 U$40.GNDVIA3 U$40.GNDVIA4 U$40.GNDVIA6 U$40.P$1 U$40.P$5 U$40.P$6 U$40.P$10 U$41.GNDVIA1 U$41.GNDVIA3 U$41.GNDVIA4 U$41.GNDVIA6 U$41.P$1 U$41.P$5 U$41.P$6 U$41.P$10 U$42.4
GND7: C8.2 U$43.GNDVIA1 U$43.GNDVIA3 U$43.GNDVIA4 U$43.GNDVIA6 U$43.P$1 U$43.P$5 U$43.P$6 U$43.P$10 U$44.GNDVIA1 U$44.GNDVIA3 U$44.GNDVIA4 U$44.GNDVIA6 U$44.P$1 U$44.P$5 U$44.P$6 U$44.P$10 U$45.GNDVIA1 U$45.GNDVIA3 U$45.GNDVIA4 U$45.GNDVIA6 U$45.P$1 U$45.P$5 U$45.P$6 U$45.P$10 U$46.GNDVIA1 U$46.GNDVIA3 U$46.GNDVIA4 U$46.GNDVIA6 U$46.P$1 U$46.P$5 U$46.P$6 U$46.P$10 U$47.GNDVIA1 U$47.GNDVIA3 U$47.GNDVIA4 U$47.GNDVIA6 U$47.P$1 U$47.P$5 U$47.P$6 U$47.P$10 U$48.4
GND8: C9.2 U$49.GNDVIA1 U$49.GNDVIA3 U$49.GNDVIA4 U$49.GNDVIA6 U$49.P$1 U$49.P$5 U$49.P$6 U$49.P$10 U$50.GNDVIA1 U$50.GNDVIA3 U$50.GNDVIA4 U$50.GNDVIA6 U$50.P$1 U$50.P$5 U$50.P$6 U$50.P$10 U$51.GNDVIA1 U$51.GNDVIA3 U$51.GNDVIA4 U$51.GNDVIA6 U$51.P$1 U$51.P$5 U$51.P$6 U$51.P$10 U$52.GNDVIA1 U$52.GNDVIA3 U$52.GNDVIA4 U$52.GNDVIA6 U$52.P$1 U$52.P$5 U$52.P$6 U$52.P$10 U$53.GNDVIA1 U$53.GNDVIA3 U$53.GNDVIA4 U$53.GNDVIA6 U$53.P$1 U$53.P$5 U$53.P$6 U$53.P$10 U$54.4
GND9: C10.2 U$55.GNDVIA1 U$55.GNDVIA3 U$55.GNDVIA4 U$55.GNDVIA6 U$55.P$1 U$55.P$5 U$55.P$6 U$55.P$10 U$56.GNDVIA1 U$56.GNDVIA3 U$56.GNDVIA4 U$56.GNDVIA6 U$56.P$1 U$56.P$5 U$56.P$6 U$56.P$10 U$57.GNDVIA1 U$57.GNDVIA3 U$57.GNDVIA4 U$57.GNDVIA6 U$57.P$1 U$57.P$5 U$57.P$6 U$57.P$10 U$58.GNDVIA1 U$58.GNDVIA3 U$58.GNDVIA4 U$58.GNDVIA6 U$58.P$1 U$58.P$5 U$58.P$6 U$58.P$10 U$59.GNDVIA1 U$59.GNDVIA3 U$59.GNDVIA4 U$59.GNDVIA6 U$59.P$1 U$59.P$5 U$59.P$6 U$59.P$10 U$60.4
GND10: C11.2 U$61.GNDVIA1 U$61.GNDVIA3 U$61.GNDVIA4 U$61.GNDVIA6 U$61.P$1 U$61.P$5 U$61.P$6 U$61.P$10 U$62.GNDVIA1 U$62.GNDVIA3 U$62.GNDVIA4 U$62.GNDVIA6 U$62.P$1 U$62.P$5 U$62.P$6 U$62.P$10 U$63.GNDVIA1 U$63.GNDVIA3 U$63.GNDVIA4 U$63.GNDVIA6 U$63.P$1 U$63.P$5 U$63.P$6 U$63.P$10 U$64.GNDVIA1 U$64.GNDVIA3 U$64.GNDVIA4 U$64.GNDVIA6 U$64.P$1 U$64.P$5 U$64.P$6 U$64.P$10 U$65.GNDVIA1 U$65.GNDVIA3 U$65.GNDVIA4 U$65.GNDVIA6 U$65.P$1 U$65.P$5 U$65.P$6 U$65.P$10 U$66.4
GND11: C12.2 U$67.GNDVIA1 U$67.GNDVIA3 U$67.GNDVIA4 U$67.GNDVIA6 U$67.P$1 U$67.P$5 U$67.P$6 U$67.P$10 U$68.GNDVIA1 U$68.GNDVIA3 U$68.GNDVIA4 U$68.GNDVIA6 U$68.P$1 U$68.P$5 U$68.P$6 U$68.P$10 U$69.GNDVIA1 U$69.GNDVIA3 U$69.GNDVIA4 U$69.GNDVIA6 U$69.P$1 U$69.P$5 U$69.P$6 U$69.P$10 U$70.GNDVIA1 U$70.GNDVIA3 U$70.GNDVIA4 U$70.GNDVIA6 U$70.P$1 U$70.P$5 U$70.P$6 U$70.P$10 U$71.GNDVIA1 U$71.GNDVIA3 U$71.GNDVIA4 U$71.GNDVIA6 U$71.P$1 U$71.P$5 U$71.P$6 U$71.P$10 U$72.4
GND12: C13.2 U$73.GNDVIA1 U$73.GNDVIA3 U$73.GNDVIA4 U$73.GNDVIA6 U$73.P$1 U$73.P$5 U$73.P$6 U$73.P$10 U$74.GNDVIA1 U$74.GNDVIA3 U$74.GNDVIA4 U$74.GNDVIA6 U$74.P$1 U$74.P$5 U$74.P$6 U$74.P$10 U$75.GNDVIA1 U$75.GNDVIA3 U$75.GNDVIA4 U$75.GNDVIA6 U$75.P$1 U$75.P$5 U$75.P$6 U$75.P$10 U$76.GNDVIA1 U$76.GNDVIA3 U$76.GNDVIA4 U$76.GNDVIA6 U$76.P$1 U$76.P$5 U$76.P$6 U$76.P$10 U$77.GNDVIA1 U$77.GNDVIA3 U$77.GNDVIA4 U$77.GNDVIA6 U$77.P$1 U$77.P$5 U$77.P$6 U$77.P$10 U$78.4
GND13: C14.2 U$79.GNDVIA1 U$79.GNDVIA3 U$79.GNDVIA4 U$79.GNDVIA6 U$79.P$1 U$79.P$5 U$79.P$6 U$79.P$10 U$80.GNDVIA1 U$80.GNDVIA3 U$80.GNDVIA4 U$80.GNDVIA6 U$80.P$1 U$80.P$5 U$80.P$6 U$80.P$10 U$81.GNDVIA1 U$81.GNDVIA3 U$81.GNDVIA4 U$81.GNDVIA6 U$81.P$1 U$81.P$5 U$81.P$6 U$81.P$10 U$82.GNDVIA1 U$82.GNDVIA3 U$82.GNDVIA4 U$82.GNDVIA6 U$82.P$1 U$82.P$5 U$82.P$6 U$82.P$10 U$83.GNDVIA1 U$83.GNDVIA3 U$83.GNDVIA4 U$83.GNDVIA6 U$83.P$1 U$83.P$5 U$83.P$6 U$83.P$10 U$84.4
GND14: C15.2 U$85.GNDVIA1 U$85.GNDVIA3 U$85.GNDVIA4 U$85.GNDVIA6 U$85.P$1 U$85.P$5 U$85.P$6 U$85.P$10 U$86.GNDVIA1 U$86.GNDVIA3 U$86.GNDVIA4 U$86.GNDVIA6 U$86.P$1 U$86.P$5 U$86.P$6 U$86.P$10 U$87.GNDVIA1 U$87.GNDVIA3 U$87.GNDVIA4 U$87.GNDVIA6 U$87.P$1 U$87.P$5 U$87.P$6 U$87.P$10 U$88.GNDVIA1 U$88.GNDVIA3 U$88.GNDVIA4 U$88.GNDVIA6 U$88.P$1 U$88.P$5 U$88.P$6 U$88.P$10 U$89.GNDVIA1 U$89.GNDVIA3 U$89.GNDVIA4 U$89.GNDVIA6 U$89.P$1 U$89.P$5 U$89.P$6 U$89.P$10 U$90.4
N$1: C1.1 R1.2 U$7.3
N$2: R2.1 U$7.1
N$5: C2.1 R3.2 U$12.3
N$6: R4.1 U$12.1
N$8: C3.1 R5.2 U$18.3
N$9: R6.1 U$18.1
N$14: C5.1 R9.2 U$30.3
N$15: R10.1 U$30.1
N$17: C6.1 R11.2 U$36.3
N$18: R12.1 U$36.1
N$20: C7.1 R13.2 U$42.3
N$21: R14.1 U$42.1
N$23: C8.1 R15.2 U$48.3
N$24: R16.1 U$48.1
N$26: C9.1 R17.2 U$54.3
N$27: R18.1 U$54.1
N$29: C10.1 R19.2 U$60.3
N$30: R20.1 U$60.1
N$32: C11.1 R21.2 U$66.3
N$33: R22.1 U$66.1
N$35: C12.1 R23.2 U$72.3
N$36: R24.1 U$72.1
N$38: C13.1 R25.2 U$78.3
N$39: R26.1 U$78.1
N$41: C14.1 R27.2 U$84.3
N$42: R28.1 U$84.1
N$44: C15.1 R29.2 U$90.3
N$45: R30.1 U$90.1
S$1: E$18.P$2 U$91.P$3
S$2: E$18.P$4 U$91.P$1 U$91.P$5
S$3: E$76.P$4 U$19.P$1 U$19.P$5
S$4: E$76.P$2 U$19.P$3
S$5: E$76.P$3 PROG1.MP
S$10: E$18.P$3 PROG.MP
VCC: E$18.P$1 U$91.P$7 U$91.P$9
VCC1: E$76.P$1 U$19.P$7 U$19.P$9